# Altium PCB PCB.PcbDoc (part 1 of 2)
Units mm, origin at the board's own origin, x right, y up, seen from the top; angles counter-clockwise.
Board outline 59.94 x 52.58 mm, 2 copper layers (Top Layer, Bottom Layer); 90 components, 60 nets, 298 pads, 151 vias.
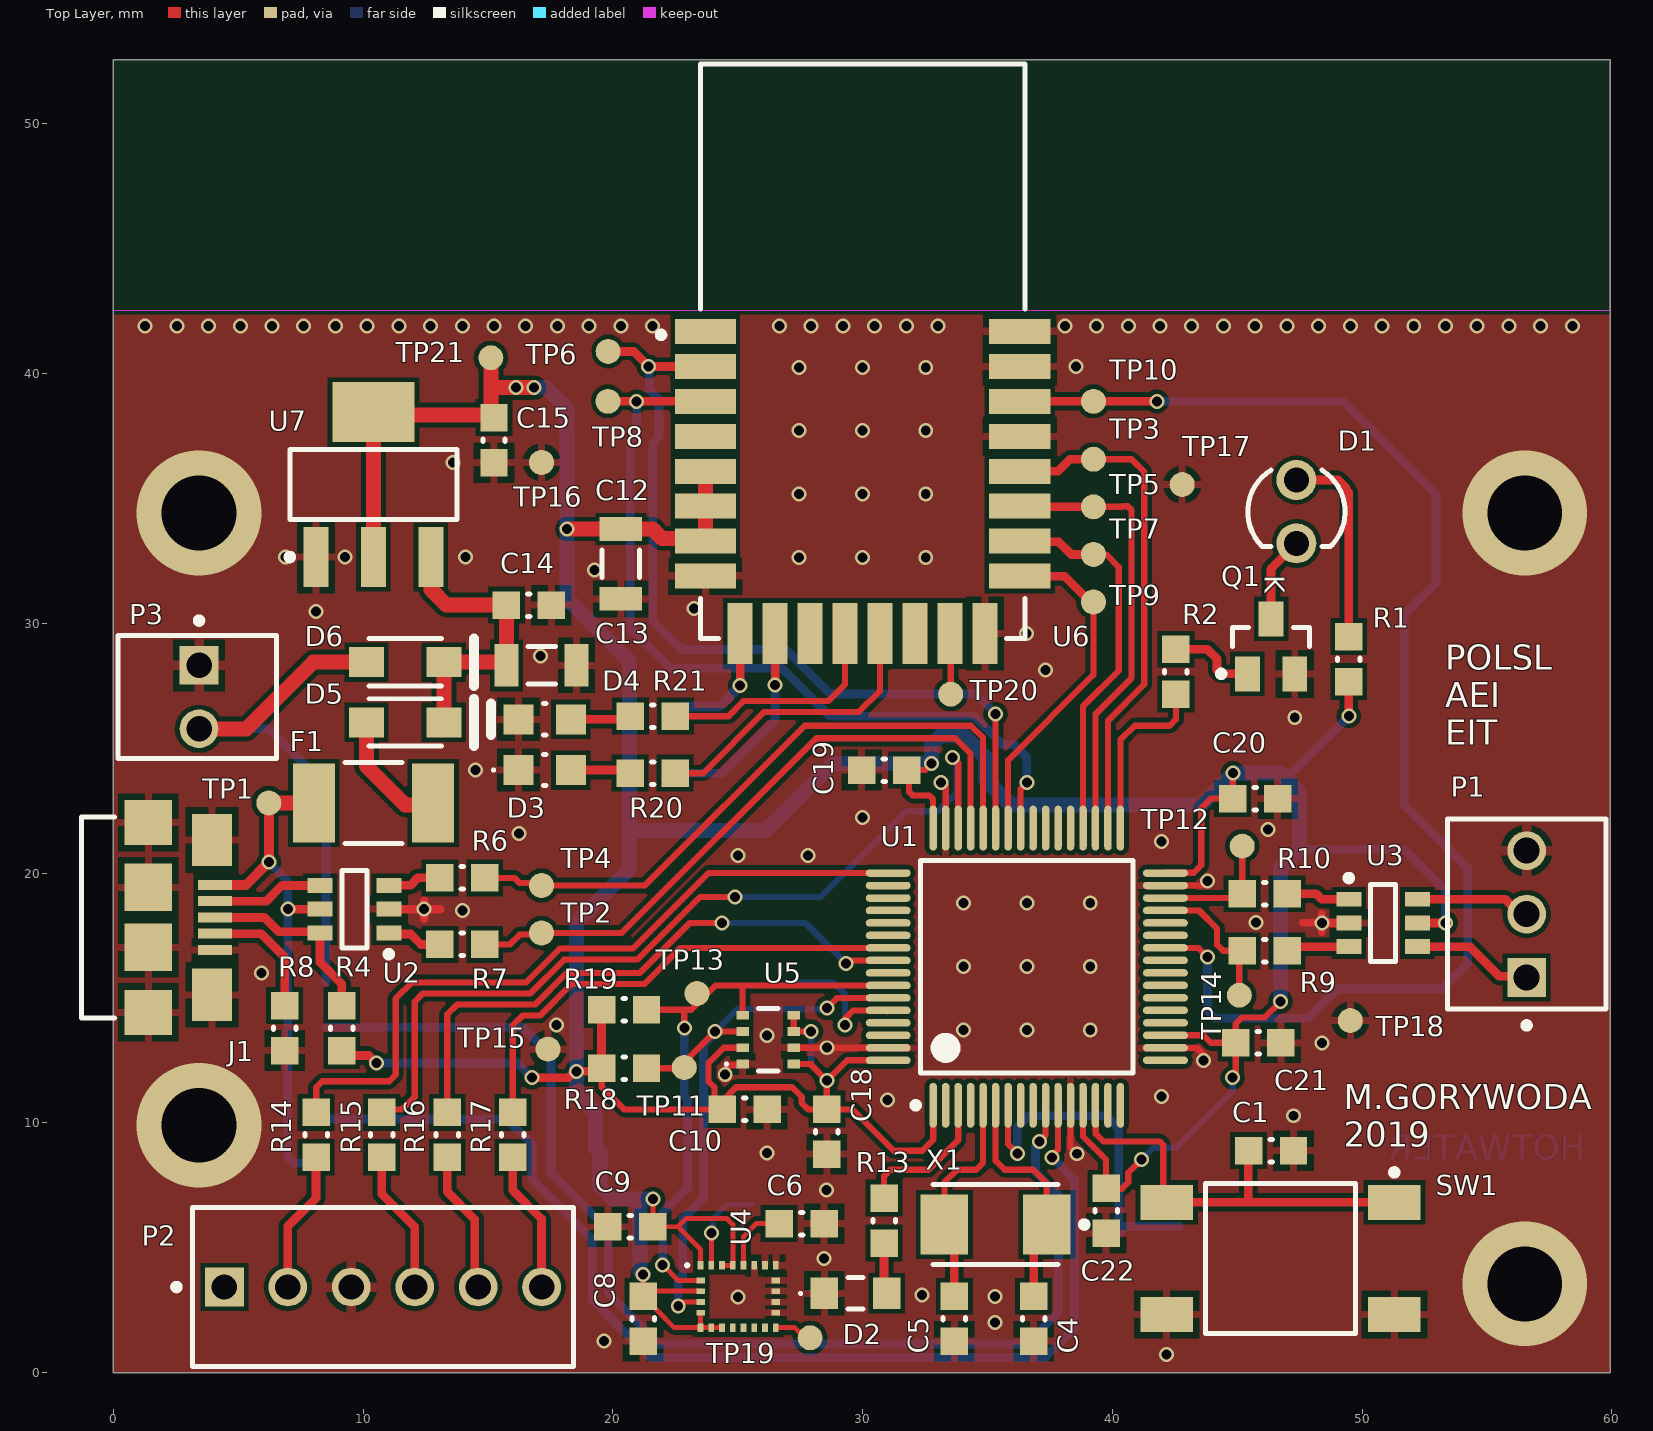
[diagram p0: Top Layer view]
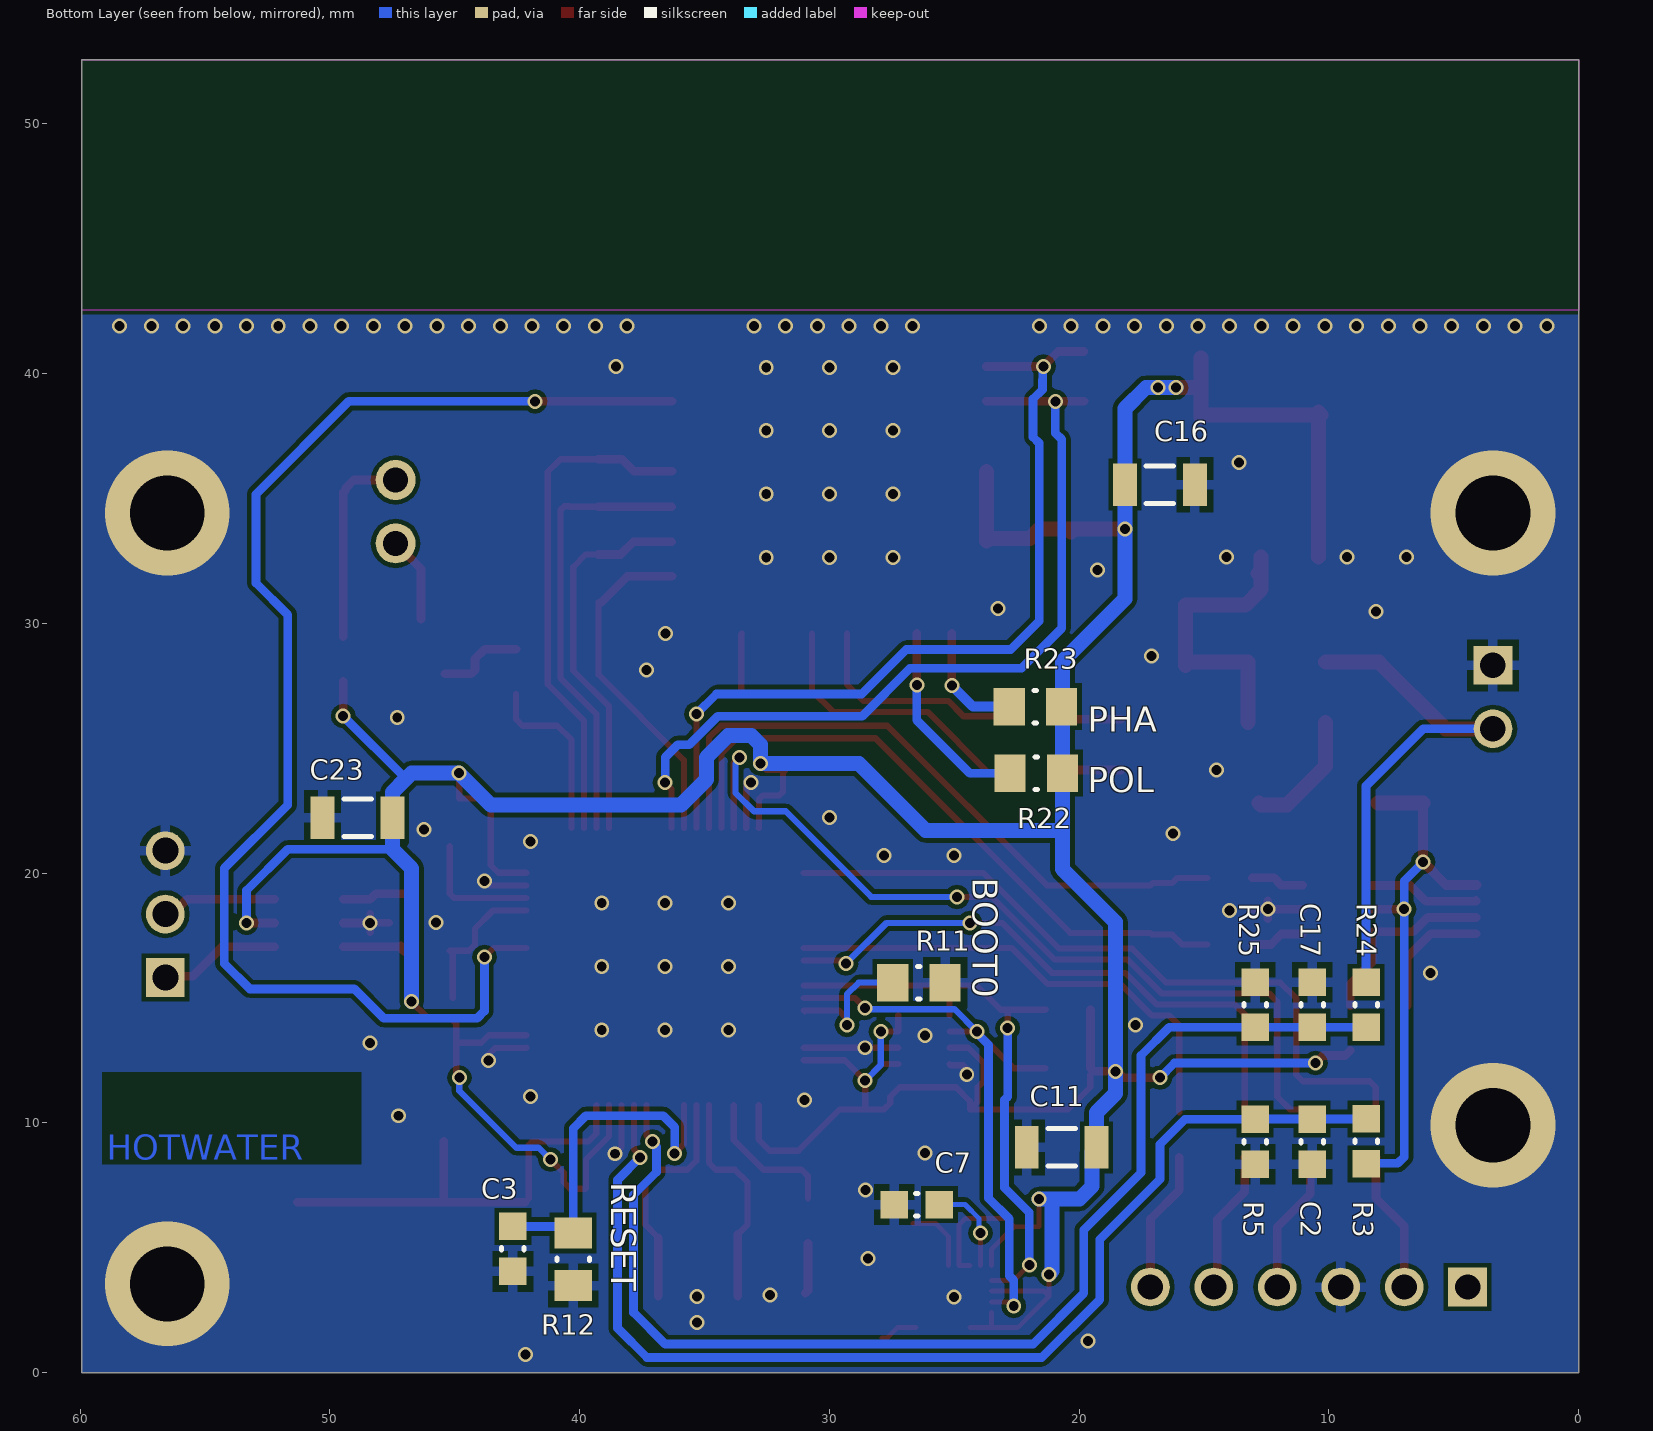
[diagram p1: Bottom Layer view, seen from below]

## Layer stack, top to bottom
Top Solder: solder mask 0.0102, Solder Resist, Dk 3.5
Top Layer: signal copper 0.0356
Dielectric 1: dielectric 0.32, FR-4, Dk 4.8
Bottom Layer: signal copper 0.0356
Bottom Solder: solder mask 0.0102, Solder Resist, Dk 3.5

## Board outline
0,0 59.944,0 59.944,52.578 0,52.578

## Design rules (kind name [scope] priority, off if disabled: settings)
Clearance [All] p1: gap=0.18 ignorepadtopadclearanceinfootprint=FALSE
HoleSize [All] p1: absolutevalues=TRUE maxlimit=4 minlimit=0.025 maxpercent=80.000 minpercent=20.000
PlaneConnect [All] p1: planeconnectstyle=Relief reliefexpansion=0.508 reliefentries=4 reliefconductorwidth=0.4 reliefairgap=0.35
PolygonConnect PolygonConnect_6 [All vs IsNamedPolygon('TOP_GND')] p1: thpad.connectstyle=Relief thpad.reliefconductorwidth=0.4 thpad.reliefentries=4 thpad.polygonreliefangle="90 Angle" thpad.airgapwidth=0.254 smdpad.connectstyle=Relief smdpad.reliefconductorwidth=0.3 smdpad.reliefentries=4 smdpad.polygonreliefangle="90 Angle" smdpad.airgapwidth=0.254 via.connectstyle=Direct via.reliefconductorwidth=0.254 via.reliefentries=4 via.polygonreliefangle="90 Angle" via.airgapwidth=0.254
PolygonConnect PolygonConnect_5 [All vs IsNamedPolygon('TOP_GND')] p2: thpad.connectstyle=Relief thpad.reliefconductorwidth=0.4 thpad.reliefentries=4 thpad.polygonreliefangle="90 Angle" thpad.airgapwidth=0.254 smdpad.connectstyle=Relief smdpad.reliefconductorwidth=0.4 smdpad.reliefentries=4 smdpad.polygonreliefangle="90 Angle" smdpad.airgapwidth=0.254 via.connectstyle=Direct via.reliefconductorwidth=0.254 via.reliefentries=4 via.polygonreliefangle="90 Angle" via.airgapwidth=0.254
PolygonConnect PolygonConnect_4 [All vs IsNamedPolygon('BOT_GND')] p3: thpad.connectstyle=Relief thpad.reliefconductorwidth=0.4 thpad.reliefentries=4 thpad.polygonreliefangle="90 Angle" thpad.airgapwidth=0.254 smdpad.connectstyle=Relief smdpad.reliefconductorwidth=0.4 smdpad.reliefentries=4 smdpad.polygonreliefangle="90 Angle" smdpad.airgapwidth=0.254 via.connectstyle=Direct via.reliefconductorwidth=0.254 via.reliefentries=4 via.polygonreliefangle="90 Angle" via.airgapwidth=0.254
PolygonConnect PolygonConnect_3 [All vs IsNamedPolygon('TOP_GND')] p4: thpad.connectstyle=Relief thpad.reliefconductorwidth=0.254 thpad.reliefentries=4 thpad.polygonreliefangle="90 Angle" thpad.airgapwidth=0.254 smdpad.connectstyle=Relief smdpad.reliefconductorwidth=0.254 smdpad.reliefentries=4 smdpad.polygonreliefangle="90 Angle" smdpad.airgapwidth=0.254 via.connectstyle=Direct via.reliefconductorwidth=0.254 via.reliefentries=4 via.polygonreliefangle="90 Angle" via.airgapwidth=0.254
PolygonConnect PolygonConnect_2 [All vs IsNamedPolygon('TOP_GND')] p5: thpad.connectstyle=Relief thpad.reliefconductorwidth=0.4 thpad.reliefentries=4 thpad.polygonreliefangle="90 Angle" thpad.airgapwidth=0.254 smdpad.connectstyle=Relief smdpad.reliefconductorwidth=0.4 smdpad.reliefentries=4 smdpad.polygonreliefangle="90 Angle" smdpad.airgapwidth=0.254 via.connectstyle=Relief via.reliefconductorwidth=0.254 via.reliefentries=4 via.polygonreliefangle="90 Angle" via.airgapwidth=0.254
PolygonConnect PolygonConnect_1 [All vs IsNamedPolygon('TOP_GND')] p6: thpad.connectstyle=Relief thpad.reliefconductorwidth=0.4 thpad.reliefentries=4 thpad.polygonreliefangle="90 Angle" thpad.airgapwidth=0.254 smdpad.connectstyle=Relief smdpad.reliefconductorwidth=0.4 smdpad.reliefentries=4 smdpad.polygonreliefangle="90 Angle" smdpad.airgapwidth=0.254 via.connectstyle=Relief via.reliefconductorwidth=0.254 via.reliefentries=4 via.polygonreliefangle="90 Angle" via.airgapwidth=0.254
PolygonConnect [All] p7: connectstyle=Relief reliefconductorwidth=0.4 reliefentries=4 polygonreliefangle="90 Angle" airgapwidth=0.25
RoutingVias [All] p1: holewidth=0.4 width=0.6 viastyle="Through Hole" minholewidth=0.3 minwidth=0.5 maxholewidth=3 maxwidth=5
SolderMaskExpansion [All] p1: expansion=0.06 soldermaskfromhole=TRUE
Width [All] p1: maxlimit=1 minlimit=0.2 preferedwidth=0.3
28 further rules are at their usual default settings.

## Classes and differential pairs
component class 4_Power: C13 C14 C15 C16 C17 C18 C19 C20 C21 C22 C23 D5 D6 F1 P3 R24 R25 TP21 U7
component class 3_Radio: C12 D3 D4 R20 R21 R22 R23 TP20 U6
component class 2_Sensors: C6 C7 C8 C9 C10 C11 R18 R19 TP19 U4 U5
component class 1_MCU: C1 C2 C3 C4 C5 D1 D2 J1 P1 P2 Q1 R1 R2 R3 R4 R5 R6 R7 R8 R9 R10 R11 R12 R13 R14 R15 R16 R17 SW1 TP1 TP2 TP3 TP4 TP5 TP6 TP7 TP8 TP9 TP10 TP11 TP12 TP13 TP14 TP15 TP16 TP17 TP18 U1 U2 U3 X1

## Components (designator, comment, footprint, x,y, rotation, side; value= is the part's Value field where it differs from the comment)
C1 "100nF" CAPC0603(1608)100_M 46.355,8.89 r0 top
C2 "100nF" CAPC0603(1608)100_M 10.668,9.249 r270 bottom
C3 "100nF" CAPC0603(1608)100_M 42.672,4.953 r270 bottom
C4 "18pF" CAPC0603(1608)100_M 36.85,2.159 r90 top
C5 "18pF" CAPC0603(1608)100_M 33.675,2.159 r90 top
C6 "10nF" CAPC0603(1608)100_M 27.559,5.969 r180 top
C7 "100nF" CAPC0603(1608)100_M 26.498,6.731 r0 bottom
C8 "100nF" CAPC0603(1608)100_M 21.209,2.159 r270 top
C9 "100nF" CAPC0603(1608)100_M 20.701,5.842 r180 top
C10 "100nF" CAPC0603(1608)100_M 25.273,10.541 r0 top
C11 "10uF" CAPC1206(3216)130_L 20.701,9.017 r180 bottom
C12 "10uF" CAPC1206(3216)130_L 20.32,32.385 r90 top
C13 "10uF" CAPC1206(3216)130_L 17.145,28.321 r180 top
C14 "100nF" CAPC0603(1608)100_M 16.637,30.734 r180 top
C15 "100nF" CAPC0603(1608)100_M 15.24,37.338 r90 top
C16 "10uF" CAPC1206(3216)130_L 16.764,35.56 r0 bottom
C17 "100nF" CAPC0603(1608)100_M 10.668,14.732 r270 bottom
C18 "100nF" CAPC0603(1608)100_M 28.569,9.652 r90 top
C19 "100nF" CAPC0603(1608)100_M 30.861,24.13 r0 top
C20 "100nF" CAPC0603(1608)100_M 45.72,22.987 r180 top
C21 "100nF" CAPC0603(1608)100_M 45.847,13.208 r180 top
C22 "100nF" CAPC0603(1608)100_M 39.751,6.477 r90 top
C23 "10uF" CAPC1206(3216)130_L 48.895,22.225 r180 bottom
D1 "IR" "Type 3mm" 47.371,34.475 r270 top
D2 "AMBER" LTST-C171AKT_V 29.718,3.175 r180 top
D3 "LTST-C170GKT" LTST-C170GKT_V 17.272,24.13 r180 top
D4 "LTST-C170KRKT" LTST-C170KRKT_V 17.272,26.162 r180 top
D5 "S1ML" TWS-S1ML_V 11.684,26.035 r0 top
D6 "S1ML" TWS-S1ML_V 11.684,28.448 r0 top
F1 "MINISMDC075F-2" TECO-MINISMDC075F_V 10.414,22.813 r0 top
J1 "10118192-0001LF" FCI-10118192-0001LF-5_V 1.397,18.229 r270 top
P1 "22-23-2031" MOLX-22-23-2031_V 56.59,18.363 r90 top
P2 "22-23-2061" MOLX-22-23-2061_V 10.795,3.429 r0 top
P3 "22-23-2021" MOLX-22-23-2021_V 3.429,27.051 r270 top
Q1 "MMBT3904" FAIR-SOT23-3_V 46.355,29.083 r90 top
R1 "330R" RESC0603(1608)_M 49.468,28.575 r270 top value="330.00 Ohm"
R2 "1K" RESC0603(1608)_M 42.545,28.067 r270 top value="1000.00 Ohm"
R3 "100K" RESC0603(1608)_M 8.509,9.26 r270 bottom value="100000.00 Ohm"
R4 "1K5" RESC0603(1608)_M 9.144,13.798 r270 top value="1500.00 Ohm"
R5 "100K" RESC0603(1608)_M 12.954,9.249 r90 bottom value="100000.00 Ohm"
R6 "22R" RESC0603(1608)_M 13.97,19.812 r180 top value="22.00 Ohm"
R7 "22R" RESC0603(1608)_M 13.97,17.145 r180 top value="22.00 Ohm"
R8 "100K" RESC0603(1608)_M 6.858,13.798 r90 top value="100000.00 Ohm"
R9 "22R" RESC0603(1608)_M 46.101,16.891 r0 top value="22.00 Ohm"
R10 "22R" RESC0603(1608)_M 46.101,19.177 r0 top value="22.00 Ohm"
R11 "Jumper" RESC0805(2012)_M 26.416,15.621 r0 bottom value="0.00 Ohm"
R12 "Jumper" RESC0805(2012)_M 40.259,4.538 r90 bottom value="0.00 Ohm"
R13 "1K" RESC0603(1608)_M 30.861,6.085 r90 top value="1000.00 Ohm"
R14 "22R" RESC0603(1608)_M 8.118,9.525 r270 top value="22.00 Ohm"
R15 "22R" RESC0603(1608)_M 10.743,9.525 r270 top value="22.00 Ohm"
R16 "22R" RESC0603(1608)_M 13.368,9.525 r270 top value="22.00 Ohm"
R17 "22R" RESC0603(1608)_M 15.992,9.525 r270 top value="22.00 Ohm"
R18 "1K" RESC0603(1608)_M 20.447,12.192 r180 top value="1000.00 Ohm"
R19 "1K" RESC0603(1608)_M 20.447,14.531 r180 top value="1000.00 Ohm"
R20 "1K" RESC0603(1608)_M 21.59,24.003 r0 top value="1000.00 Ohm"
R21 "1K" RESC0603(1608)_M 21.601,26.289 r0 top value="1000.00 Ohm"
R22 "Jumper" RESC0805(2012)_M 21.717,24.003 r0 bottom value="0.00 Ohm"
R23 "Jumper" RESC0805(2012)_M 21.751,26.67 r0 bottom value="0.00 Ohm"
R24 "100K" RESC0603(1608)_M 8.509,14.732 r90 bottom value="100000.00 Ohm"
R25 "22K" RESC0603(1608)_M 12.954,14.732 r270 bottom value="22000.00 Ohm"
SW1 "4-1437565-1" TECO-4-1437565-1_V 46.736,4.572 r270 top
TP1 "VBUS" TP-SM-C-100 6.223,22.813 r0 top
TP2 "DP" TP-SM-C-100 17.145,17.607 r90 top
TP3 "SCK" TP-SM-C-100 39.243,36.576 r90 top
TP4 "DM" TP-SM-C-100 17.145,19.506 r90 top
TP5 "MISO" TP-SM-C-100 39.243,34.671 r90 top
TP6 "WKUP" TP-SM-C-100 19.812,40.894 r180 top
TP7 "MOSI" TP-SM-C-100 39.243,32.766 r180 top
TP8 "RRST" TP-SM-C-100 19.801,38.894 r180 top
TP9 "SS" TP-SM-C-100 39.243,30.861 r180 top
TP10 "IRQ" TP-SM-C-100 39.243,38.894 r180 top
TP11 "SDA" TP-SM-C-100 22.86,12.218 r180 top
TP12 "RX" TP-SM-C-100 45.201,21.082 r90 top
TP13 "SCL" TP-SM-C-100 23.368,15.181 r90 top
TP14 "TX" TP-SM-C-100 45.085,15.113 r90 top
TP15 "GND" TP-SM-C-100 17.399,12.954 r90 top
TP16 "GND" TP-SM-C-100 17.145,36.449 r90 top
TP17 "GND" TP-SM-C-100 42.799,35.56 r90 top
TP18 "GND" TP-SM-C-100 49.53,14.097 r90 top
TP19 "DEN" TP-SM-C-100 27.9,1.397 r180 top
TP20 "RXOK" TP-SM-C-100 33.528,27.167 r0 top
TP21 "3V3" TP-SM-C-100 15.113,40.64 r180 top
U1 "STM32F103RBT6TR" STM-LQFP64_N 36.576,16.256 r90 top
U2 "USBLC6-2SC6" SOT95P280X145-6N 9.652,18.557 r180 top
U3 "USBLC6-2SC6" SOT95P280X145-6N 50.843,18.006 r0 top
U4 "LSM9DS1TR" STM-LGA-24_3500X3000X1000 25.019,3.048 r0 top
U5 "BME280" BOSC-BME280-8_V 26.221,13.335 r180 top
U6 "DWM1000" DECW-DWM1000-24_V 30,40.894 r0 top
U7 "LM1117MPX-3.3" MP04A_N 10.414,35.56 r90 top
X1 "ABM3-8.000MHZ-D2Y-T" ABRA-ABM3-2_V 35.326,5.931 r180 top

## Footprints (in the part's own frame and the unit in brackets; to place one, negate y for a bottom-side part, rotate by r counter-clockwise, add the part's x,y. Pads: shape width x height; smd on the part's side, far side on the other; paste and mask are expansions set on the pad)
ABRA-ABM3-2_V [mm] "SMD, 2-Leads, Body 5x3.2mm, Pitch 4.1mm"
  rect 1.9x2.4 smd: 1(-2.05,0) 2(2.05,0)
  silkscreen extent -3.68,-1.6 2.5,1.6, body extent -2.5,-1.6 2.5,1.6, height 1.3
BOSC-BME280-8_V [mm] "SMD, 8-Leads, Body 2.5x2.5mm, Pitch 0.65mm"
  rect 0.5x0.35 smd: 1(1.025,0.975) 2(1.025,0.325) 3(1.025,-0.325) 4(1.025,-0.975) 5(-1.025,-0.975) 6(-1.025,-0.325) 7(-1.025,0.325) 8(-1.025,0.975)
  silkscreen extent -0.39,-1.25 1.72,1.25, body extent -1.25,-1.25 1.25,1.25, height 1
CAPC0603(1608)100_M [mm] "Chip Capacitor, Body 1.6x0.8mm, Height 1.0mm, IPC Low Density"
  rect 1.1x1.1 smd: 1(-0.9,0) 2(0.9,0)
  silkscreen extent -0.05,-0.45 0.05,0.45, body extent -0.87,-0.47 0.88,0.48, height 1
CAPC1206(3216)130_L [mm] "Chip Capacitor, Body 3.2x1.6mm, Height 1.3mm, IPC High Density"
  rect 0.95x1.7 smd: 1(-1.4,0) 2(1.4,0)
  silkscreen extent -0.55,-0.75 0.55,0.75, body extent -1.7,-0.9 1.7,0.9, height 1.3
DECW-DWM1000-24_V [mm] "SMD, 24-Leads, Body 23x13mm, Pitch 1.4mm"
  rect 2.45x1 smd: 1(-6.295,0.8) 2(-6.295,-0.6) 3(-6.295,-2) 4(-6.295,-3.4) 5(-6.295,-4.8) 6(-6.295,-6.2) 7(-6.295,-7.6) 8(-6.295,-9) 17(6.295,-9) 18(6.295,-7.6) 19(6.295,-6.2) 20(6.295,-4.8) 21(6.295,-3.4) 22(6.295,-2) 23(6.295,-0.6) 24(6.295,0.8)
  rect 1x2.45 smd: 9(-4.9,-11.295) 10(-3.5,-11.295) 11(-2.1,-11.295) 12(-0.7,-11.295) 13(0.7,-11.295) 14(2.1,-11.295) 15(3.5,-11.295) 16(4.9,-11.295)
  silkscreen extent -8.19,-11.5 6.5,11.5, body extent -6.5,-11.5 6.5,11.5, height 4
FAIR-SOT23-3_V [mm] "SOT23, 3-Leads, Body 3.12x1.5mm, Pitch 0.95mm"
  rect 1.4x1 smd: 1(-1.1,0.95) 2(-1.1,-0.95) 3(1.1,0)
  silkscreen extent -1.22,-1.55 0.75,2.12, body extent -1.35,-1.56 1.35,1.56, height 1.2
FCI-10118192-0001LF-5_V [mm] "SMD, 5-Leads, Body 8.05x5.77mm, Pitch 0.65mm"
  rect 0.4x1.35 smd: 1(-1.3,2.675) 2(-0.65,2.675) 3(0,2.675) 4(0.65,2.675) 5(1.3,2.675)
  rect 2.1x1.6 smd: 6(-3.1,2.55) 7(3.1,2.55)
  rect 1.8x1.9 smd: 8(-3.8,0) 9(3.8,0)
  rect 1.9x1.9 smd: 10(-1.2,0) 11(1.2,0)
  silkscreen extent -4.03,-2.67 4.03,-1.35, body extent -4.03,-2.67 4.03,3.1, height 2.7
LTST-C170GKT_V [mm]
  rect 1.2x1.2 smd: A(-1.05,0) C(1.05,0)
  silkscreen extent -0.05,-0.63 2.1,0.63, body extent -1,-0.63 1,0.63, height 1.1
LTST-C170KRKT_V [mm] "SMD, 2-Leads, Body 2x1.25mm"
  rect 1.2x1.2 smd: 1(-1.05,0) 2(1.05,0)
  silkscreen extent -0.05,-0.63 2.16,0.64, body extent -1,-0.63 1,0.63, height 1.2
LTST-C171AKT_V [mm]
  rect 1.1x1.25 smd: A(-1.25,0) C(1.25,0)
  silkscreen extent -0.3,-0.63 2.25,0.63, body extent -1,-0.63 1,0.63, height 0.8
MOLX-22-23-2021_V [mm] "THD, 2-Leads, Body 6.35x4.93mm, Pitch 2.54mm"
  rect 1.55x1.55 hole 1.02 mask+0.06: 1(-1.27,0)
  round 1.55 hole 1.02 mask+0.06: 2(1.27,0)
  silkscreen extent -3.19,-3.25 2.46,3.1, body extent -2.46,-3.25 2.46,3.1, height 10.66
MOLX-22-23-2031_V [mm] "CONN, 3-Leads, Body 7.62x6.35mm, Pitch 2.54mm"
  rect 1.55x1.55 hole 1.05 mask+0.06: 1(-2.54,0)
  round 1.55 hole 1.05 mask+0.06: 2(0,0) 3(2.54,0)
  silkscreen extent -4.58,-3.18 3.81,3.18, body extent -3.73,-3.25 3.73,3.1, height 10.67
MOLX-22-23-2061_V [mm] "THD, 6-Leads, Body 15.24x6.35mm, Pitch 2.54mm"
  rect 1.55x1.55 hole 1.02 mask+0.06: 1(-6.35,0)
  round 1.55 hole 1.02 mask+0.06: 2(-3.81,0) 3(-1.27,0) 4(1.27,0) 5(3.81,0) 6(6.35,0)
  silkscreen extent -8.39,-3.17 7.62,3.17, body extent -7.54,-3.25 7.54,3.1, height 10.67
MP04A_N [mm] "SOT223, 4-Leads, Body 6.5x3.5mm, Pitch 2.3mm, Lead Span 7mm, IPC Medium Density"
  rect 2.4x1 smd: 1(-2.9,2.3) 2(-2.9,0) 3(-2.9,-2.3)
  rect 2.4x3.3 smd: 4(2.9,0)
  silkscreen extent -3.02,-3.35 1.4,3.47, body extent -1.86,-3.35 1.86,3.35, height 1.8
RESC0603(1608)_M [mm] "Chip Resistor, Body 1.6x0.8mm, IPC Low Density"
  rect 1.1x1.1 smd: 1(-0.9,0) 2(0.9,0)
  silkscreen extent -0.05,-0.45 0.05,0.45, body extent -0.85,-0.47 0.85,0.47, height 0.6
RESC0805(2012)_M [mm] "Chip Resistor, Body 2.0x1.3mm, IPC Low Density"
  rect 1.25x1.5 smd: 1(-1.05,0) 2(1.05,0)
  silkscreen extent -0.05,-0.65 0.05,0.65, body extent -1.1,-0.67 1.1,0.67, height 0.7
SOT95P280X145-6N [mm] "SOT23, 6-Leads, Body 2,93x2,80mm, Pitch 0,95mm, IPC Medium Density"
  rect 1x0.6 smd: 1(-1.375,0.95) 2(-1.375,0) 3(-1.375,-0.95) 4(1.375,-0.95) 5(1.375,0) 6(1.375,0.95)
  silkscreen extent -1.5,-1.55 0.5,1.92, body extent -0.88,-1.52 0.87,1.53, height 1.45
STM-LGA-24_3500X3000X1000 [mm] "LGA, 24-Leads, Body 3.65x3.15mm, Pitch 0.43mm"
  rect 0.23x0.35 smd mask+0.05: 1(-1.505,1.25) 6(-1.505,-1.25) 7(-1.075,-1.25) 8(-0.645,-1.25) 9(-0.215,-1.25) 10(0.215,-1.25) 11(0.645,-1.25) 12(1.075,-1.25) 13(1.505,-1.25) 18(1.505,1.25) 19(1.075,1.25) 20(0.645,1.25) 21(0.215,1.25) 22(-0.215,1.25) 23(-0.645,1.25) 24(-1.075,1.25)
  rect 0.35x0.23 smd mask+0.05: 2(-1.505,0.645) 3(-1.505,0.215) 4(-1.505,-0.215) 5(-1.505,-0.645) 14(1.505,-0.645) 15(1.505,-0.215) 16(1.505,0.215) 17(1.505,0.645)
  silkscreen extent -2.11,1.19 -1.98,1.31, body extent -1.82,-1.57 1.83,1.58, height 1.03
STM-LQFP64_N [mm] "Thin QFP, 64-Leads, Body 10x10mm, Pitch 0.5mm, IPC Medium Density"
  oval 1.8x0.3 smd: 1(-5.55,3.75) 2(-5.55,3.25) 3(-5.55,2.75) 4(-5.55,2.25) 5(-5.55,1.75) 6(-5.55,1.25) 7(-5.55,0.75) 8(-5.55,0.25) 9(-5.55,-0.25) 10(-5.55,-0.75) 11(-5.55,-1.25) 12(-5.55,-1.75) 13(-5.55,-2.25) 14(-5.55,-2.75) 15(-5.55,-3.25) 16(-5.55,-3.75) 33(5.55,-3.75) 34(5.55,-3.25) 35(5.55,-2.75) 36(5.55,-2.25) 37(5.55,-1.75) 38(5.55,-1.25) 39(5.55,-0.75) 40(5.55,-0.25) 41(5.55,0.25) 42(5.55,0.75) 43(5.55,1.25) 44(5.55,1.75) 45(5.55,2.25) 46(5.55,2.75) 47(5.55,3.25) 48(5.55,3.75)
  oval 0.3x1.8 smd: 17(-3.75,-5.55) 18(-3.25,-5.55) 19(-2.75,-5.55) 20(-2.25,-5.55) 21(-1.75,-5.55) 22(-1.25,-5.55) 23(-0.75,-5.55) 24(-0.25,-5.55) 25(0.25,-5.55) 26(0.75,-5.55) 27(1.25,-5.55) 28(1.75,-5.55) 29(2.25,-5.55) 30(2.75,-5.55) 31(3.25,-5.55) 32(3.75,-5.55) 49(3.75,5.55) 50(3.25,5.55) 51(2.75,5.55) 52(2.25,5.55) 53(1.75,5.55) 54(1.25,5.55) 55(0.75,5.55) 56(0.25,5.55) 57(-0.25,5.55) 58(-0.75,5.55) 59(-1.25,5.55) 60(-1.75,5.55) 61(-2.25,5.55) 62(-2.75,5.55) 63(-3.25,5.55) 64(-3.75,5.55)
  silkscreen extent -5.67,-4.25 4.25,4.57, body extent -5,-5 5,5, height 1.6
TECO-4-1437565-1_V [mil] "SMD, 4-Leads, Body 6x6mm, Pitch 9.1mm"
  rect 55x83 smd: 1(-88.5,179.5) 2(-88.5,-179.5) 3(88.5,179.5) 4(88.5,-179.5)
  silkscreen extent -141,-118 118,184, body extent -118,-197 118,197, height 200
TECO-MINISMDC075F_V [mm] "SMD, 2-Leads, Body 4.55x3.24mm"
  rect 1.68x3.15 smd: 1(-2.39,0) 2(2.39,0)
  silkscreen extent -1.15,-1.62 1.15,1.62, body extent -2.27,-1.62 2.27,1.62, height 0.62
TP-SM-C-100 [mm] "Test Point, Surface Mounting, Circular, Pad Diameter 1mm"
  round 1 smd: 1(0,0)
TWS-S1ML_V [mm] "Molded Diode, 2-Leads, Body 2.9x1.9mm"
  rect 1.4x1.2 smd: 1(-1.55,0) 2(1.55,0)
  silkscreen extent -1.45,-0.95 2.75,0.95, body extent -1.67,-0.95 1.67,0.95, height 1.43
"Type 3mm" [mm] "THT, LED-3mm, 2pin- Body 4.15mm(max)"
  round 1.6 hole 1 mask+0.06: 1(1.27,0) 2(-1.27,0)
  silkscreen extent -1.66,-1.95 1.4,1.95, body extent -1.93,-1.94 1.87,1.94, height 10.5

## Part data
C1 C2 C3 C7 C8 C9 C10 C14 C15 C17 C18 C19 C20 C21 C22: library part CMP-1035-02589-1, "CAP 100nF 25V ±20% 0603 (1608 Metric) Thickness 1mm SMD", Case-EIA=0603, Case-Metric=1608, Rated Voltage="25 V", Tolerance=±20%, Max Thickness="1 mm", Technology=SMT
C4 C5: library part CMP-1035-00741-1, "CAP 18pF 25V ±0.5pF 0603 (1608 Metric) Thickness 1mm SMD", Case-EIA=0603, Case-Metric=1608, Rated Voltage="25 V", Tolerance=±0.5pF, Max Thickness="1 mm", Technology=SMT
C6: library part CMP-1035-02316-1, "CAP 10nF 25V ±5% 0603 (1608 Metric) Thickness 1mm SMD", Case-EIA=0603, Case-Metric=1608, Rated Voltage="25 V", Tolerance=±5%, Max Thickness="1 mm", Technology=SMT
C11 C12 C13 C16 C23: library part CMP-1037-04977-1, "CAP 10uF 16V -20% to +80% 1206 (3216 Metric) Thickness 1.3mm SMD", Case-EIA=1206, Case-Metric=3216, Rated Voltage="16 V", Tolerance="-20% to +80%", Max Thickness="1.3 mm", Technology=SMT
D1: library part CMP-1488-00005-1, "THT LED round mono-color color lens, WL-TMRW, Super Red", Emitting color="Super Red", Manufacturer="Wuerth Elektronik", PartNumber=151031SS04000, ComponentLink1Description="Manufacturer URL", ComponentLink1URL=http://www.we-online.com, ComponentLink2Description=Datasheet, ComponentLink2URL=http://katalog.we-online.de/pbs/datasheet/7448042001.pdfhttp://katalog.we-online.de/pbs/datasheet/7448042001.pdfhttp://katalog.we-online.de/pbs/datasheet/7448042001.pdfhttp://katalog.we-online.de/pbs/datasheet/151031SS04000.pdf, PackageReference="Type 3mm"
D2: library part CMP-1674-00004-3, "LED AMBER CLR THIN 0805 SMD", Manufacturer=Lite-On, PartNumber=LTST-C171AKT, ComponentLink1Description=Datasheet, ComponentLink1URL=http://optoelectronics.liteon.com/upload/download/DS-22-99-0170/S_110_LTST-C171AKT.pdf, PackageReference=C171AKT
D3: library part CMP-1674-00002-3, "LED GREEN CLEAR 0805 SMD", Manufacturer=Lite-On, ComponentLink1Description=Datasheet, ComponentLink1URL=http://media.digikey.com/pdf/Data%20Sheets/Lite-On%20PDFs/LTST-C170GKT.pdf, PackageReference=C170GKT, PartNumber=LTST-C170GKT
D4: library part CMP-2000-07593-1, "LED Red, 75 mW, 54 mcd, -55 to 85 degC, 2-Pin SMD, RoHS, Tape and Reel", Case\/Package=0805, Case Code (Metric)=2012, Colour=Red, Forward Current=30mA, Forward Voltage=2V, Lens Colour=Colorless, Manufacturer=Lite-On, Max Operating Temperature=85degC, Min Operating Temperature=-55degC, Package Description="2-Pin Surface Mount Device, Body 2 x 1.25 mm", Package Quantity=1, Package Reference=C170KRKT, Power Dissipation=75mW, Test Current=20mA, Case Code (Imperial)=0805, Datasheet URL=http://optoelectronics.liteon.com/upload/download/DS-22-99-0150/LTST-C170KRKT.pdf, Datasheet Version="Rev. D, 11/2014", Depth=1.6mm, Dominant Wavelength=631nm, Height=1.1mm, Illumination Colour=Red, Lead Free=LeadFree, Length=3.2mm, Lens Style=Rectangular, Lens Transparency=Clear, Luminous Intensity=54mcd, Manufacturer URL=http://www.us.liteon.com/, Mount=SurfaceMount, Mounting Technology=SurfaceMount, Number of Elements=1, Number of LEDs=1, Number of Pins=2, Packaging=TapeandReel, Power Rating=75mW, Radiation Hardening=No, RoHSCompliant=True, Viewing Angle=130degrees, Wavelength=639nm, Width=1.25mm
D5 D6: library part CMP-2000-07014-1, "Rectifier, 1 A, 1.1 V, -55 to 175 degC, 2-Pin SMD, RoHS, Tape and Reel", Diode Case Style=SMD, Forward Current If(AV)=1A, Forward Surge Current Ifsm Max=30A, Forward Voltage VF Max=1.1V, Manufacturer="Taiwan Semiconductor", Operating Temperature Max=150°C, Package Description="2-Pin Surface Mount Device, Body 2.8 x 1.8 mm", Repetitive Reverse Voltage Vrrm Max=1kV, Datasheet URL=http://www.taiwansemi.com/products/datasheet/S1AL%20SERIES_O15.pdf, Datasheet Version="Rev. O15, 05/2015", Diode Configuration=Single, Manufacturer URL=http://www.taiwansemi.com/, Mounting Technology=SurfaceMount, No. of Pins=2Pin, Package Reference=S1ML, Packaging=CutTape, Product Range=-, Reverse Recovery Time trr Max=1.8µs, SVHC=NoSVHC(15-Jun-2015)
F1: library part CMP-2000-06707-1, "PolySwitch Resettable Device, 13.2 V, 0.75 A, -40 to 85 degC, 2-Pin SMD, RoHS, Tape and Reel", Holding Current=750mA, Initial Resistance Max="0.45 /  / ohm", Manufacturer="TE Connectivity", Operating Temperature Max=85°C, Operating Temperature Min=-40°C, Operating Voltage="13.2 /  / V", Package Description="2-Pin Surface Mount Device, Body 4.55 x 3.24 mm", Package Reference=MINISMDC075F, PTC Fuse Case Style=SMD, Tripping Current=1.5A, Voltage Rating=13.2VDC, Datasheet URL=http://www.te.com/commerce/DocumentDelivery/DDEController?Action=srchrtrv&DocNm=CLP00010&DocType=CS&DocLang=English, Datasheet Version=11/2013, Manufacturer URL=http://www.te.com/, Mounting Technology=SurfaceMount, Product Range=PolySwitchminiSMDCSeries, SVHC=NoSVHC(15-Jun-2015), Thermistor Mounting=SMD
J1: library part CMP-2000-05118-1, "Micro USB B Type Receptacle, -55 to 85 degC, 5-Pin SMD, RoHS, Tape and Reel", Color=Black, Current Rating=1.8A, Flammability Rating=UL94V-0, Insulation Resistance=1000MOhms, Manufacturer=FCI, Operating Temperature Range=-55Cto+85C, Brand=FCI, Connector Type=MicroUSBTypeBreceptacle, Contact Material=CopperAlloy, Contact Plating=Gold, Datasheet URL=http://www.mouser.com/ds/2/154/10118192-793027.pdf, Datasheet Version="Rev. B, 05/2015", Factory Pack Quantity=1400, Gender=Female, Manufacturer URL=http://www.fci.com/, Mounting Angle=Right, Number of Contacts=5Contact, Packaging=Reel, Product=MicroUSBTypeBConnectors, Product Category=USBConnectors, RoHS=Details, Standard=USB2.0, Termination Style=SMD/SMT
P1: library part CMP-2000-05242-1, "Male Header, Pitch 2.54 mm, 1 x 3 Position, Height 8.18 mm, Tail Length 3.56 mm, RoHS, Bulk", Current Rating=4A, Manufacturer=Molex, Voltage Rating=250V, =0022232031A-6373-03A102, Brand=Molex, Contact Gender=Pin(Male), Contact Material=Brass, Contact Plating=Tin, Datasheet URL=https://datasheet.ciiva.com/19472/232274-19472863.pdf, Datasheet Version=Sep-01, Factory Pack Quantity=16000, Housing Material=Nylon, Manufacturer URL=http://www.molex.com/, Mounting Angle=Vertical, Mounting Style=ThroughHole, Number of Positions=3Position, Number of Rows=1Row, Packaging=Bulk, Pitch=2.54mm, Product=Headers, Product Category=Headers&WireHousings, RoHS=Details, Series=6373, Termination Style=ThroughHole, Tradename=KK, Type=Locking
P2: library part CMP-2000-05536-1, "Male Header, Pitch 2.54 mm, 1 x 6 Position, Height 10.67 mm, Tail Length 3.56 mm, 0 to 70 degC, RoHS, Bulk", Current Rating=4A, Manufacturer=Molex, Package Description="Male Header, Pitch 2.54 mm, 1 x 6 Position, Height 10.67 mm, Tail Length 3.56 mm", Voltage Rating=250V, =002223206122-23-2061-PBA-6373-06A102, Brand=Molex, Contact Material=Brass, Contact Plating=Tin, Datasheet URL=https://datasheet.ciiva.com/19460/232303-19460895.pdf, Datasheet Version="Rev. P, 09/2001", Factory Pack Quantity=1000, Housing Material=Nylon, Manufacturer URL=http://www.molex.com/, Mounting Angle=Vertical, Mounting Style=ThroughHole, Mounting Technology=ThroughHole, Number of Positions=6, Number of Positions / Contacts=6, Number of Rows=1, Package Reference=22-23-2061, Packaging=Bulk, Pitch=2.54mm, Product Category=.100K.K.Connectors, Product Type=Headers, RoHS=Details, Series=6373, Termination Style=ThroughHole, Tradename=KK, Type=PinStrip
P3: library part CMP-1704-00001-1, "Male Header, Pitch 2.54 mm, 1 x 2 Position, Height 10.67 mm, Tail Length 3.56 mm, 0 to 75 degC, RoHS, Bulk", Manufacturer=Molex, ComponentLink1Description="Manufacturer URL", ComponentLink1URL=http://www.molex.com/, ComponentLink2Description=Datasheet, ComponentLink2URL=https://datasheet.ciiva.com/19454/232266-19454304.pdf, Mounting Technology="Through Hole", PackageDescription="Male Header, Pitch 2.54 mm, 1 x 2 Position, Height 10.67 mm, Tail Length 3.56 mm", PackageReference=22-23-2021, PartNumber=22-23-2021
Q1: library part CMP-1670-00008-1, "NPN General Purpose Amplifier, 40 V, 0.2 A, -55 to 150 degC, 3-Pin SOT23, RoHS, Tape and Reel", Capacitance="1.8E-11 f", Frequency="12.288 MHz", Frequency Tolerance=30ppm, Load Capacitance="18 pF", Max Operating Temperature=70degC, Min Operating Temperature=-20degC, Package Quantity=1000, ComponentLink1Description="Manufacturer URL", ComponentLink1URL=https://www.fairchildsemi.com/, ComponentLink2Description=Datasheet, ComponentLink2URL=https://www.fairchildsemi.com/datasheets/MM/MMBT3904.pdf, ComponentLink3Description="Package Specification", ComponentLink3URL=http://www.fairchildsemi.com/dwg/MA/MA03D.pdf, DatasheetVersion="Rev. 1.1.0, 10/2014", ESR="40 Ohm", Height="0.041 inch", Length="0.197 inch", Mount="Surface Mount", PackageDescription="3-Pin Small Outline Transistor, Body 2.92 x 1.325 mm, Pitch 0.95 mm", PackageReference=SOT23-3, Packaging="Tape and Reel", Pins=4, REACH SVHC="No SVHC", RoHSCompliant=True, Tolerance=30ppm, Width="0.126 inch"
R1: library part CMP-1012-00454-1, "330R 0.1W 1% 0603 (1608 Metric)  SMD", Case-EIA=0603, Case-Metric=1608, Power="0.1 W", Tolerance="1 %", Technology=SMT
R2 R13 R18 R19 R20 R21: library part CMP-1012-00510-1, "1K 0.1W 1% 0603 (1608 Metric)  SMD", Case-EIA=0603, Case-Metric=1608, Power="0.1 W", Tolerance="1 %", Technology=SMT
R3 R5 R8 R24: library part CMP-1012-00736-1, "100K 0.1W 1% 0603 (1608 Metric)  SMD", Case-EIA=0603, Case-Metric=1608, Power="0.1 W", Tolerance="1 %", Technology=SMT
R4: library part CMP-1012-00528-1, "1K5 0.1W 1% 0603 (1608 Metric)  SMD", Case-EIA=0603, Case-Metric=1608, Power="0.1 W", Tolerance="1 %", Technology=SMT
R6 R7 R9 R10 R14 R15 R16 R17: library part CMP-1012-00320-1, "22R 0.1W 1% 0603 (1608 Metric)  SMD", Case-EIA=0603, Case-Metric=1608, Power="0.1 W", Tolerance="1 %", Technology=SMT
R11 R12 R22 R23: library part CMP-1013-00001-1, "Jumper 0805 (2012 Metric)", Case-EIA=0805, Case-Metric=2012, Power=None, Technology=SMT, Tolerance=None
R25: library part CMP-1012-00659-1, "22K 0.1W 1% 0603 (1608 Metric)  SMD", Case-EIA=0603, Case-Metric=1608, Power="0.1 W", Tolerance="1 %", Technology=SMT
SW1: library part CMP-2000-05602-1, "Tactile Switch, 50 mA, 12 VDC, -20 to 85 degC, 4-Pin SMD, RoHS, Bulk", Actuator Color=N/A, Contact Rating @ Voltage=0.05@12VDCA, Dielectric Strength=500VAC, Manufacturer=TEConnectivity/AMPBrand, Maximum Contact Resistance=100mOhm, Maximum DC Voltage Rating=12V, Minimum Insulation Resistance=100MOhm, Operating Force=1.57N, Operating Temperature=-20to85C, Package Description="4-Pin Surface Mount Device, Body 6 x 6 mm, Pitch 9.1 mm", Actuator Length=1.4mm, Actuator Style=RoundButton, Base Material=N/A, Body Orientation=Straight, Contact Material=CopperAlloy, Contact Plating=Silver, Datasheet URL=https://datasheet.ciiva.com/14635/0900766b80912216-14635826.pdf, Datasheet Version=04/2007, Dimension=6x10x5.25mm, Electrical Life=100000Cycle, Family=FSMJSMA, Ground Terminal=No, Housing Material=N/A, Illumination Type=N/R, Manufacturer URL=http://www.te.com/, Maximum AC Voltage Rating=N/A, Mechanical Life=N/A, Mounting=SurfaceMount,GullWing, Mounting Technology=SurfaceMount, Package Reference=4-1437565-1, Packaging=Bulk, Part No=4-1437565-1, Pole Throw Configuration=N/A, Product Weight=N/A, RoHS=Yes, Seal Description=N/A, Seal Location=N/A, Switch Configuration=N/A, Type=N/A
TP1 TP2 TP3 TP4 TP5 TP6 TP7 TP8 TP9 TP10 TP11 TP12 TP13 TP14 TP15 TP16 TP17 TP18 TP19 TP20 TP21: library part CMP-0484-00002-2, "Test Point, Surface Mount, Circular, Pad Diameter 1 mm", Manufacturer="No Vendor", PartNumber=TP-SM-C-100
U1: library part CMP-0237-00169-2, "ARM Cortex-M3 32-bit MCU, 128 KB Flash, 20 KB Internal RAM, 51 I/Os, 64-pin LQFP, -40 to 85 degC, Tape and Reel", I/Os (High Current)=51, Operating Frequency(F) (Processor speed) (MHz)=72, Supply Voltage(Vcc) min (V)=2, A/D Converter="2x12-bit (16 Channel)", ComponentLink1Description="Manufacturer URL", ComponentLink1URL=http://www.st.com/web/en/home.html, ComponentLink2Description=Datasheet, ComponentLink2URL=http://www.st.com/st-web-ui/static/active/en/resource/technical/document/datasheet/CD00161566.pdf, ComponentLink3Description="Package Specification", ComponentLink3URL=http://www.st.com/st-web-ui/static/active/en/resource/technical/document/datasheet/DM00037051.pdf, Core="ARM Cortex-M3", DatasheetVersion="Rev. 16", FLASH Size (Prog) (kB)=128, Internal RAM Size (kB)=20, Mounting Technology="Surface Mount", PackageDescription="64-Pin Low Profile Quad Flat Package, 10 x 10 mm Body, 0.5 mm Pitch", PackageReference=LQFP64, PackageVersion="Rev. 4, 06/2013", Packing="Tape and Reel", PartId=1, PartNumber=STM32F103RBT6TR
U2 U3: "TVS DIODE 5.25V 17V SOT23-6", Breakdown Voltage=6V, Capacitance=3.5pF, Case/Package=SOT-23, Clamping Voltage=17V, Leakage Current=150nA, Manufacturer=STMicroelectronics, Max Operating Temperature=125°C, Min Operating Temperature=-40°C, Operating Supply Voltage=1.1V, Package Quantity=3000, Peak Pulse Current=5A, Power Line Protection=Yes, Reverse Standoff Voltage=5.25V, Test Current=1mA, Working Voltage=5V, ComponentLink1Description=https://datasheet.ciiva.com/1268/1690354-1268384.pdf?src-supplier=Element14, ComponentLink1URL=https://datasheet.ciiva.com/1268/1690354-1268384.pdf?src-supplier=Element14, ComponentLink2Description=https://datasheet.ciiva.com/4508/cd00050750-113117-4508433.pdf?src-supplier=Mouser, ComponentLink2URL=https://datasheet.ciiva.com/4508/cd00050750-113117-4508433.pdf?src-supplier=Mouser, ComponentLink3Description=https://datasheet.ciiva.com/15143/getdatasheetpartid-148465-15143789.pdf?src-supplier=Verical, ComponentLink3URL=https://datasheet.ciiva.com/15143/getdatasheetpartid-148465-15143789.pdf?src-supplier=Verical, ComponentLink4Description=https://datasheet.ciiva.com/26787/usblc6-2sc6-26787908.pdf?src-supplier=IIIC, ComponentLink4URL=https://datasheet.ciiva.com/26787/usblc6-2sc6-26787908.pdf?src-supplier=IIIC, ComponentLink5Description=https://datasheet.ciiva.com/16200/cd00050750-16200026.pdf?src-supplier=Future+Electronics, ComponentLink5URL=https://datasheet.ciiva.com/16200/cd00050750-16200026.pdf?src-supplier=Future+Electronics, ComponentLink6Description=https://datasheet.ciiva.com/41444/001184109-da-01-en-ic-esd-protecti-usblc6-2sc6-sot-23-6-stm-41444156.pdf?src-supplier=Conrad, ComponentLink6URL=https://datasheet.ciiva.com/41444/001184109-da-01-en-ic-esd-protecti-usblc6-2sc6-sot-23-6-stm-41444156.pdf?src-supplier=Conrad, Contact Plating=Tin, Data Rate=480Mbps, Depth=1.75mm, Direction=Unidirectional, Element Configuration=Dual, ESD Protection=Yes, Height=1.3mm, Lead Free="Lead Free", Length=3.05mm, Manufacturer Part Number=USBLC6-2SC6, Max Breakdown Voltage=6V, Max Reverse Leakage Current=150nA, Min Breakdown Voltage=6V, Mount="Surface Mount", Number of Bidirectional Channels=2, Number of Channels=2, Number of Elements=1, Number of Pins=6, Packaging="Tape and Reel", Polarity=Unidirectional, Pricing 1="1 = 0,49000, 10 = 0,41900, 100 = 0,31310, 500 = 0,24602, 1000 = 0,19010 (USD)", Radiation Hardening=No, REACH SVHC="No SVHC", Reverse Breakdown Voltage=6V, RoHS=Yes, Stock 1=85571, Supplier 1=Digi-Key, Termination=SMD/SMT, Width=1.75mm
U4: library part CMP-2000-06606-1, "iNEMO Inertial Module: 3D Accelerometer, 3D Gyroscope, 3D Magnetometer, 1.9 to 3.6 V, -40 to 85 degC, 24-Pin LGA, RoHS, Tape and Reel", Manufacturer=STMicroelectronics, Package Description="24-Pin Plastic Land Grid Array Package, Body 3.65 x 3.15 mm, Pitch 0.43 mm", Package Reference=LGA-24_3500X3000X1000, PartNumber=LSM9DS1, Sensor Case Style=LGA, Supply Voltage Max=3.6V, Supply Voltage Min=1.9V, Acceleration Range=±2g,±4g,±8g,±16g, Datasheet URL=http://www2.st.com/content/ccc/resource/technical/document/datasheet/1e/3f/2a/d6/25/eb/48/46/DM00103319.pdf/files/DM00103319.pdf/jcr:content/translations/en.DM00103319.pdf, Datasheet Version="Rev. 3, 03/2015", Gyroscope Range=±245°/s,±500°/s,±2000°/s, Manufacturer URL=http://www.st.com/, MEMS Module Function=Tri-AxisGyroscope,Tri-AxisAccelerometer,Tri-AxisMagnetometer, Mounting Technology=SurfaceMount, MSL=MSL3-168hours, No. of Pins=24Pins, Packaging=CutTape, Product Range=-, SVHC=NoSVHC(17-Dec-2015)
U5: library part CMP-2000-05073-1, "Combined Humidity and Pressure Sensor, 1.71 to 3.6 V, -40 to 85 degC, 8-Pin SMD, RoHS, Tape and Reel", Manufacturer="Bosch Sensortec", Datasheet URL=http://datasheet.octopart.com/BME280-Bosch-datasheet-58577763.pdf, Datasheet Version="Rev. 1.2, 10/2015", Manufacturer URL=http://www.bosch-sensortec.com
U6: library part CMP-2000-05094-1, "DW M1000 IEEE 802.15.4 -2011 UWB Transceiver Module", Current - Receiving=64mA, Current - Transmitting=31mA, Frequency=3.5GHz~6.5GHz, Manufacturer=Decawave, Operating Temperature=-40degC~85degC, Package / Case=Module, Power - Output=-, Standard Package=500, Voltage - Supply=2.8V~3.6V, Antenna Type=Integrated,Chip, Category=RF/IFandRFID, Data Rate=6.8Mbps, Datasheet URL=http://www.decawave.com/sites/default/files/resources/dwm1000-datasheet-v1.3.pdf, Datasheet Version="Rev. V1.0, 12/2015", Design Resources=DevelopmentToolSelector, Family=RFTransceiverModules, Featured Product=ScenSorDWM1000Module, Manufacturer URL=http://www.decawave.com/, Memory Size=-, Modulation=BPM,BPSK, Mounting Type=SurfaceMount, Online Catalog=ScenSorDWM1000Module, Other Names=1479-1002-2RUPF-G001A, Packaging=Tape&Reel(TR), Protocol=IR-UWB, RF Family/Standard=802.15.4, Sensitivity=-, Serial Interfaces=SPI, Series=-
U7: library part CMP-0062-01659-3, "800mA Low-Dropout Linear Regulator, 4-pin SOT-223", Manufacturer="National Semiconductor", PackageTopMarking=XYTT*N05A, PowerWise=N, Code_IPC=SOT223-4, Code_JEDEC=TO-261-AA, ComponentLink1Description="Manufacturer URL", ComponentLink1URL=http://www.national.com/, ComponentLink2Description="LM1117 Datasheet", ComponentLink2URL=http://www.national.com/ds/LM/LM1117.pdf, ComponentLink3Description="LM1117 Web Page", ComponentLink3URL=http://www.national.com/pf/LM/LM1117.html, ComponentLink4Description="MP04A Package Page", ComponentLink4URL=http://www.national.com/packaging/folders/mp04a.html, CompType="LDO IC", DatasheetVersion=Apr-2006, High-Reliability=Y, PackageDescription="Molded SOT-223, 6.50 x 3.56 x 1.6mm Body, 4 Lead, 2.3mm Pitch", PackageReference=MP04A, PackageVersion="revB, Apr-2003", PartNumber=LM1117MPX-3.3, PinCount=4, RevisionNote="SCH symbol layout adjusted", RoHS=N
X1: library part CMP-2000-05033-1, "Miniature Ceramic Crystal, 8 MHz, -40 to 85 degC, 2-Pin SMD, RoHS, Tape and Reel", Case Height=1.3mm, Case Length=5mm, Case Width=3.2mm, Frequency=8MHz, Frequency Stability=30PPM, Load Capacitance=18pF, Manufacturer=ABRACON, Operating Temperature Range=-40Cto+85C, Package / Case=5mmx3.2mm, Package Description="2-Pin Surface Mount Device, Body 5 x 3.2 mm", Package Reference=ABM3-2, Tolerance=20PPM, Brand=ABRACON, Datasheet URL=http://www.farnell.com/datasheets/1754353.pdf, Datasheet Version=Sep-13, Dimensions=3.2mmWx5mmLx1.3mmH, ESR=140Ohms, Factory Pack Quantity=1000, Manufacturer URL=http://www.abracon.com/, Mounting Style=SMD/SMT, Package URL=http://www.abracon.com/Support/PackageDrawing/Resonators/ABM3.PDF, Packaging=Reel, Product Category=Crystals, RoHS=Details, Series=ABM3, Termination Style=SMD/SMT, Type=MiniatureCeramicCrystal

## Via types
v1: diameter 0.6, hole 0.4, Top Layer to Bottom Layer, tented both sides, 147 vias
v2: diameter 5, hole 3, Top Layer to Bottom Layer, 4 vias

## Nets (pads, with @x,y where several pads share a name; then routed paths per layer and width w, separated by ;. In a path a pad name is that pad's centre, name@x,y a point inside that pad or via, vN(x,y) a via of type N, cw(c..) or ccw(c..) an arc to the next point about the centre after c; other vN are vias at no path point)
+3V3: C8.1 C9.1 C10.1 C11.2 C12.2 C15.2 C16.2 C18.2 C19.2 C20.2 C21.2 C22.2 C23.2 R1.2 R4.2 R18.2 R19.2 R22.1 R23.1 TP21.1 U1.1 U1.13 U1.19 U1.32 U1.48 U1.64 U3.5 U4.1 U4.3 U4.5 U4.6 U4.7 U4.8 U4.22 U4.23 U5.2 U5.5 U5.6 U5.8 U6.5 U6.6 U6.7 U7.2 U7.4 | length 207.7
  Top Layer w0.2: v1(21.209,3.937) C8.1 ; v1(21.601,6.96) C9.1 22.606,5.842 ; U4.5 U4.6 ; U4.3 21.413,3.263 C8.1 ; U4.1 23.514,4.934 22.606,5.842 ; U4.8 U4.7 U4.6 ; U4.23 U4.22 24.804,5.923 24.549,6.178 22.942,6.178 22.606,5.842 ; C8.1 22.098,2.17 22.098,2.159 22.459,1.798 U4.6
  Top Layer w0.25: R18.2@19.42,12.065 19.558,11.927 19.558,11.43 20.447,10.541 C10.1 ; U5.2 24.44,13.01 23.827,12.397 23.827,11.668 24.065,11.43 24.065,10.849 C10.1 ; U5.8 27.94,12.36 27.94,12.319 v1(28.569,11.69) ; U5.5 U5.6 v1(27.94,13.66) ; U1.64 29.385,12.506 v1(28.569,11.69) ; v1(32.766,24.384) 32.512,24.13 C19.2 31.858,24.033 31.858,23.26 32.004,23.114 32.672,23.114 32.818,22.968 32.818,21.814 U1.48 ; U1.1 32.826,9.331 32.385,8.89 31.242,8.89 29.591,10.541 28.58,10.541 C18.2 ; U1.13 38.829,10.703 38.829,9.451 39.751,8.529 C22.2 39.762,7.366 40.386,7.366 40.64,7.62 40.64,8.001 v1(41.168,8.529) v1@41.275,8.529 ; U1.19 43.644,13.506 43.942,13.208 C21.2 ; U1.32 42.136,20.016 43.257,20.016 43.561,20.32 43.561,22.606 43.942,22.987 C20.2 44.82,23.992 v1(44.831,24.003) ; v1(44.82,11.811) 44.947,11.938 C21.2 ; v1(46.736,14.859) 46.101,14.224 45.201,14.224 44.947,13.97 C21.2 ; C10.1 24.373,10.872 24.931,11.43 27.178,11.43 27.559,11.049 27.559,10.795 27.813,10.541 28.558,10.541 C18.2 ; C18.2 v1(28.569,11.69)
  Top Layer w0.35: R4.2 9.342,12.7 10.238,12.7 v1(10.541,12.397) ; v1(16.764,11.811) 18.223,11.811 18.477,12.065 v1(18.545,12.065) 19.42,12.065 R18.2 R19.2 ; v1(49.468,26.289) R1.2 ; U3.5 v1(53.34,18.006)
  Top Layer w0.6: U7.4@10.308,38.354 U7.4 ; U7.2 U7.4 ; TP21.1 15.113,39.439 ; v1(16.838,39.439) v1(16.129,39.439) 15.113,39.439 ; v1(18.161,33.782) 20.196,33.782 C12.2@20.32,33.658 ; C12.2 20.323,33.782 21.59,33.782 21.971,33.401 23.598,33.401 U6.7 U6.6 U6.5 ; U7.4 10.52,38.354 14.997,38.354 15.113,38.238 15.113,39.439
  Bottom Layer w0.25: v1(27.94,13.66) 27.94,12.319 v1(28.569,11.69) ; v1(41.168,8.529) 41.645,9.006 42.534,9.006 44.82,11.292 v1(44.82,11.811)
  Bottom Layer w0.35: v1(10.541,12.397) 16.178,12.397 v1(16.764,11.811) ; 46.99,23.749 46.99,23.811 v1(49.468,26.289) ; 47.498,20.955 51.689,20.955 53.34,19.304 v1(53.34,18.006)
  Bottom Layer w0.6: v1(16.129,39.439) v1(16.838,39.439) 17.33,39.439 18.161,38.608 v1(18.161,33.782) 18.161,30.988 20.667,28.482 R22.1 20.667,21.717 ; v1(21.209,3.937) 21.082,4.064 21.082,6.96 ; v1(21.601,6.96) 21.082,6.96 ; v1(46.736,14.859) 46.736,20.193 47.498,20.955 47.498,23.241 46.99,23.749 46.736,24.003 v1(44.831,24.003) 43.561,22.733 35.941,22.733 34.925,23.749 34.925,24.638 34.059,25.504 33.117,25.504 32.766,25.153 v1(32.766,24.384) 28.817,24.384 26.15,21.717 20.667,21.717 ; 20.667,21.717 20.667,20.159 18.545,18.037 v1(18.545,12.065) 18.545,11.173 19.304,10.414 19.304,9.02 C11.2 19.476,8.842 19.476,7.463 19.98,6.96 21.082,6.96
BAT_ADC: C17.2 R24.1 R25.2 U1.10 | length 48.2
  Top Layer w0.25: v1(37.084,9.26) 37.326,9.502 U1.10
  Bottom Layer w0.35: R24.1 16.394,13.832 17.526,12.7 17.526,8.001 19.812,5.715 19.812,3.175 21.844,1.143 36.576,1.143 37.846,2.413 37.846,7.112 36.927,8.031 36.927,9.035 37.084,9.192 v1(37.084,9.26)
BUS_ADC: C2.1 R3.1 R5.2 U1.11 | length 46
  Top Layer w0.25: v1(37.592,8.616) 37.592,8.711 37.826,8.945 U1.11
  Bottom Layer w0.35: R3.1 12.943,10.16 R5.2 15.759,10.149 16.764,9.144 16.764,7.747 19.177,5.334 19.177,2.921 21.495,0.603 37.306,0.603 38.481,1.778 38.481,7.727 v1(37.592,8.616)
BUT: C1.1 SW1.1 SW1.2 U1.14 | length 18
  Top Layer w0.25: U1.14 39.336,10.696 39.336,9.567 39.643,9.259 41.891,9.259 42.037,9.113 42.037,6.96 SW1.2
  Top Layer w0.35: SW1.2 45.466,6.82 ; C1.1@45.444,9.26 45.444,6.842 45.466,6.82 ; SW1.1 45.466,6.82
DM: R6.1 TP4.1 U1.44 | length 26.5
  Top Layer w0.25: R6.1 16.061,19.812 16.27,19.603 17.048,19.603 TP4.1 21.284,19.506 27.686,25.908 34.336,25.908 34.826,25.418 U1.44
DP: R7.1 TP2.1 U1.45 | length 26.1
  Top Layer w0.25: R7.1 15.875,17.145 16.27,17.54 17.078,17.54 TP2.1 20.362,17.607 28.155,25.4 33.708,25.4 34.326,24.782 U1.45
GND: C1.2 C2.2 C3.2 C4.1 C5.1 C6.1 C7.2 C8.2 C9.2 C10.2 C11.1 C12.1 C13.1 C14.1 C15.1 C16.1 C17.1 C18.1 C19.1 C20.1 C21.1 C22.1 C23.1 D2.C D3.C D4.2 J1.5 J1.6 J1.7 J1.8 J1.9 J1.10 J1.11 P1.3 P2.3 P3.1 Q1.2 R5.1 R8.1 R11.1 R12.1 R25.1 SW1.3 SW1.4 TP15.1 TP16.1 TP17.1 TP18.1 U1.12 U1.18 U1.31 U1.47 U1.63 U2.2 U3.2 U4.14 U4.15 U4.16 U4.17 U4.18 U4.19 U4.20 U5.1 U5.7 U6.8 U6.16 U6.21 U6.23 U6.24 U7.1 | length 17.7
  Top Layer w0.25: v1(24.5,11.938) 24.5,12.164 24.646,12.31 25.146,12.31 U5.1 ; U5.7 v1(28.569,13.01) 28.571,13.008 31.024,13.008 U1.63 ; v1(33.147,23.622) 33.274,23.495 33.326,23.495 U1.47 ; U1.12 38.326,9.029 v1(38.59,8.765) ; U1.18 42.136,12.996 43.392,12.996 43.644,12.744 v1(43.644,12.506) ; U1.31 43.636,19.506 v1(43.815,19.685)
  Top Layer w0.3: 47.625,18.006 v1(48.387,18.006) ; 48.387,17.634 v1(48.387,18.006) ; 48.387,18.378 v1(48.387,18.006)
  Top Layer w0.35: U2.2 v1(12.446,18.557) ; 12.446,18.185 v1(12.446,18.557) ; 12.446,18.897 v1(12.446,18.557) ; 13.081,18.557 v1(12.446,18.557) ; v1(48.387,18.006) U3.2
  other v1: 42.177,0.725 19.651,1.259 35.306,2 25.019,3.025 35.306,3.048 32.385,3.113 28.448,4.579 28.558,7.308 26.173,8.79 47.255,10.287 30.997,10.911 41.974,11.049 48.387,13.208 26.173,13.506 34.036,13.718 36.576,13.718 39.116,13.718 17.748,13.929 5.924,16.002 34.036,16.258 36.576,16.258 39.116,16.258 45.757,18.034 13.97,18.506 34.036,18.798 36.576,18.798 39.116,18.798 25.013,20.706 27.812,20.701 41.974,21.273 16.237,21.59 46.228,21.754 29.99,22.225 14.5,24.13 47.305,26.229 37.326,28.133 17.095,28.702 36.571,29.599 8.114,30.48 23.241,30.607 19.274,32.131 27.449,32.639 29.989,32.639 32.529,32.639 6.885,32.66 9.271,32.66 14.097,32.66 27.449,35.179 29.989,35.179 32.529,35.179 13.589,36.438 27.449,37.719 29.989,37.719 32.529,37.719 27.449,40.259 29.989,40.259 32.529,40.259 38.547,40.294 1.27,41.91 2.54,41.91 3.81,41.91 5.08,41.91 6.35,41.91 7.62,41.91 8.89,41.91 10.16,41.91 11.43,41.91 12.7,41.91 13.97,41.91 15.24,41.91 16.51,41.91 17.78,41.91 19.05,41.91 20.32,41.91 21.59,41.91 26.67,41.91 27.94,41.91 29.21,41.91 30.48,41.91 31.75,41.91 33.02,41.91 38.1,41.91 39.37,41.91 40.64,41.91 41.91,41.91 43.18,41.91 44.45,41.91 45.72,41.91 46.99,41.91 48.26,41.91 49.53,41.91 50.8,41.91 52.07,41.91 53.34,41.91 54.61,41.91 55.88,41.91 57.15,41.91 58.42,41.91
  other v2: 56.515,3.557 3.429,9.906 3.429,34.417 56.515,34.417
IRLED: R2.2 U1.33 | length 7.1
  Top Layer w0.25: U1.33 40.326,25.34 40.894,25.908 42.291,25.908 42.545,26.162 R2.2
IRQ: TP10.1 U1.26 U6.22 | length 54
  Top Layer w0.25: U1.26 43.446,17.006 v1(43.815,16.637)
  Top Layer w0.35: U6.22 TP10.1 v1(41.783,38.894)
  Bottom Layer w0.35: v1(41.783,38.894) 49.244,38.894 52.959,35.179 52.959,31.623 51.689,30.353 51.689,22.733 54.229,20.193 54.229,16.383 53.213,15.367 49.022,15.367 47.849,14.194 44.099,14.194 43.815,14.478 v1(43.815,16.637)
MISO: TP5.1 U1.35 U6.19 | length 17.9
  Top Layer w0.25: U6.19 U6.19@36.318,34.671 ; TP5.1 40.386,34.671 40.409,34.694 40.617,34.694 40.767,34.544 40.767,27.813 39.326,26.372 U1.35
  Top Layer w0.35: U6.19@36.318,34.671 TP5.1
MOSI: TP7.1 U1.36 U6.18 | length 15.4
  Top Layer w0.25: U6.18 U6.18@36.315,33.274 ; U1.36 38.826,26.677 40.259,28.11 40.259,32.258 39.751,32.766 TP7.1
  Top Layer w0.35: U6.18@36.315,33.274 37.846,33.274 38.354,32.766 TP7.1
NetC3_1: C3.1 R12.2 U1.7 | length 14.3
  Top Layer w0.25: U1.7 35.826,9.152 v1(36.195,8.783)
  Bottom Layer w0.35: v1(36.195,8.783) 36.195,9.828 36.654,10.287 39.751,10.287 40.259,9.779 R12.2 40.524,5.853 C3.1
NetC4_2: C4.2 U1.6 X1.1 | length 9.4
  Top Layer w0.25: U1.6 35.326,8.489 35.687,8.128 36.83,8.128 37.376,7.582 X1.1 X1.1@36.85,5.405
  Top Layer w0.35: C4.2 X1.1@36.85,5.405
NetC5_2: C5.2 U1.5 X1.2 | length 8.9
  Top Layer w0.25: X1.2@33.675,5.532 X1.2 33.276,7.622 33.782,8.128 34.544,8.128 34.826,8.41 U1.5
  Top Layer w0.35: C5.2 X1.2@33.675,5.532
NetC6_2: C6.2 U4.21 | length 2.8
  Top Layer w0.2: U4.21 25.236,4.3 25.236,5.043 25.24,5.047 25.24,5.461 25.748,5.969 C6.2
NetC7_1: C7.1 U4.24 | length 3.7
  Top Layer w0.2: U4.24 23.958,4.312 v1(23.958,5.588)
  Bottom Layer w0.2: v1(23.958,5.588) 24.003,5.633 24.003,6.164 24.57,6.731 C7.1
NetC13_2: C13.2 C14.2 D5.2 D6.2 U7.3 | length 12.1
  Top Layer w0.6: U7.3 U7.3@12.714,31.877 ; U7.3@12.83,31.993 U7.3@12.714,31.877 ; D5.2 D6.2 15.618,28.448 C13.2@15.737,28.329 ; C13.2 C13.2@15.737,28.329 ; U7.3@12.714,31.877 12.714,31.355 13.335,30.734 C14.2 C13.2@15.737,28.329
NetD1_1: D1.1 Q1.3 | length 3.4
  Top Layer w0.35: Q1.3 46.355,32.189 D1.1
NetD1_2: D1.2 R1.1 | length 8.3
  Top Layer w0.35: D1.2@47.371,35.971 D1.2 49.045,35.745 49.372,35.418 49.372,35.337 49.468,35.241 R1.1
NetD2_A: D2.A R13.1 | length 2.1
  Top Layer w0.25: D2.A D2.A@30.988,3.195
  Top Layer w0.35: R13.1 30.861,3.282 D2.A
NetD3_A: D3.A R20.1 | length 2.4
  Top Layer w0.35: D3.A 20.563,24.13 R20.1
NetD4_1: D4.1 R21.1 | length 2.4
  Top Layer w0.35: D4.1 20.574,26.162 R21.1
NetD5_1: D5.1 F1.2 | length 5.1
  Top Layer w0.6: D5.1 10.134,24.283 11.684,22.733 12.723,22.733 F1.2
NetF1_1: F1.1 J1.1 R3.2 TP1.1 U2.5 | length 21.7
  Top Layer w0.35: v1(6.985,18.557) U2.5
  Top Layer w0.4: J1.1@4.096,19.529 5.305,19.529 v1(6.223,20.447) TP1.1
  Top Layer w0.6: TP1.1 F1.1
  Bottom Layer w0.35: v1(6.223,20.447) 6.985,19.685 v1(6.985,18.557) 6.985,8.636 7.239,8.382 8.487,8.382 R3.2
NetJ1_2: J1.2 U2.4 | length 4.5
  Top Layer w0.25: J1.2@4.072,18.926 J1.2@4.106,18.96
  Top Layer w0.35: J1.2@4.096,18.879 5.596,18.879 6.116,18.879 6.744,19.507 U2.4
NetJ1_3: J1.3 R4.1 U2.6 | length 7.7
  Top Layer w0.25: U2.6@8.231,17.653 U2.6
  Top Layer w0.35: J1.3@4.096,18.229 6.044,18.229 6.62,17.653 U2.6@8.231,17.653 ; U2.6 8.277,16.433 9.144,15.566 R4.1
NetJ1_4: J1.4 R8.2 | length 5.5
  Top Layer w0.35: J1.4@4.096,17.579 5.915,17.579 ; R8.2 6.858,16.636 6.222,17.272 ; 5.915,17.579 6.222,17.272 ; 5.915,17.579 6.222,17.272
NetP1_1: P1.1 U3.4 | length 4.9
  Top Layer w0.35: U3.4 54.318,17.056 55.499,15.875 56.59,15.875 P1.1@56.642,15.823
NetP1_2: P1.2 U3.6 | length 4.7
  Top Layer w0.35: U3.6 55.738,18.956 P1.2@56.331,18.363 ; P1.2@56.29,18.363 P1.2@56.331,18.363 ; P1.2@56.642,18.363 P1.2@56.331,18.363
NetP2_2: P2.2 R14.2 | length 5.7
  Top Layer w0.35: P2.2 6.985,5.856 8.114,6.985 8.114,8.621 R14.2
NetP2_4: P2.4 R15.2 | length 5.7
  Top Layer w0.35: R15.2 10.743,7.151 12.065,5.829 P2.4
NetP2_5: P2.5 R16.2 | length 5.7
  Top Layer w0.35: R16.2 13.368,7.239 14.471,6.136 14.471,3.563 P2.5
NetP2_6: P2.6 R17.2 | length 5.7
  Top Layer w0.35: R17.2 15.992,7.308 17.145,6.155 P2.6
NetQ1_1: Q1.1 R2.1 | length 3.5
  Top Layer w0.35: R2.1 43.804,28.967 44.196,28.575 44.196,28.129 44.342,27.983 Q1.1
NetR6_2: R6.2 U2.3 | length 2.2
  Top Layer w0.25: U2.3 U2.3@11.042,19.522
  Top Layer w0.35: U2.3@11.042,19.522 11.902,19.522 12.192,19.812 R6.2
NetR7_2: R7.2 U2.1 | length 2.2
  Top Layer w0.25: U2.1 U2.1@11.072,17.562
  Top Layer w0.35: U2.1@11.072,17.562 11.902,17.562 12.319,17.145 R7.2
NetR9_2: R9.2 U3.3 | length 2.5
  Top Layer w0.35: R9.2@47.166,17.056 U3.3
  Top Layer w0.4: R9.2 R9.2@47.166,17.056
NetR10_2: R10.2 U3.1 | length 2.6
  Top Layer w0.35: R10.2 48.166,19.177 48.387,18.956 U3.1
NetR11_2: R11.2 U1.60 | length 5.4
  Top Layer w0.25: v1(29.3,13.929) 29.3,14.18 29.626,14.506 U1.60 U1.60@30.991,14.471
  Bottom Layer w0.25: R11.2 28.829,15.621 29.3,15.15 v1(29.3,13.929)
NetR20_2: R20.2 U6.13 | length 11.9
  Top Layer w0.25: R20.2 23.615,24.003 26.07,26.458 29.853,26.458 30.7,27.305 U6.13
NetR21_2: R21.2 U6.12 | length 9.4
  Top Layer w0.25: R21.2 24.631,26.289 25.24,26.898 28.639,26.898 29.3,27.559 U6.12
NetR22_2: R22.2 U6.10 | length 8.1
  Top Layer w0.25: v1(26.5,27.537) v1@26.524,27.513
  Top Layer w0.35: v1(26.5,27.537) U6.10
  Bottom Layer w0.35: R22.2 24.384,24.003 26.5,26.119 v1(26.5,27.537)
NetR23_2: R23.2 U6.9 | length 4.7
  Top Layer w0.35: v1(25.1,27.513) U6.9
  Bottom Layer w0.4: R23.2 24.257,26.67 v1(25.1,27.513)
NetTP19_1: TP19.1 U4.13 | length 1.5
  Top Layer w0.2: U4.13 27.283,1.798 27.684,1.397 TP19.1
NetTP20_1: TP20.1 U6.15 | length 2.4
  Top Layer w0.25: U6.15 33.528,29.571 TP20.1
RRST: TP8.1 U1.41 U6.3 | length 34
  Top Layer w0.25: U1.41 36.326,23.372 v1(36.576,23.622)
  Top Layer w0.35: TP8.1 v1(20.955,38.894) U6.3
  Bottom Layer w0.35: v1(20.955,38.894) 20.955,37.626 20.701,37.372 20.701,29.81 22.309,28.202 26.775,28.202 28.688,26.289 34.469,26.289 35.612,25.146 36.068,25.146 36.576,24.638 v1(36.576,23.622)
RX: R10.1 TP12.1 U1.30 | length 5.1
  Top Layer w0.25: U1.30 45.03,19.006 R10.1 TP12.1
SCK: TP3.1 U1.34 U6.20 | length 20.3
  Top Layer w0.25: TP3.1 40.767,36.576 41.275,36.068 41.275,27.559 39.826,26.11 U1.34
  Top Layer w0.35: U6.20 37.826,36.094 38.308,36.576 TP3.1
SCL: R19.1 TP13.1 U1.58 U4.2 U5.4 | length 23.8
  Top Layer w0.2: v1(21.993,4.318) 22.618,3.693 U4.2
  Top Layer w0.25: R19.1@21.336,14.542 R19.1 22.86,14.531 ; v1(22.86,13.798) 22.86,14.531 ; U5.4 25.196,15.468 25.234,15.506 ; U1.58 25.234,15.506 ; 22.86,14.531 23.143,14.531 24.118,15.506 25.234,15.506